# Altium PCB BSR049A.PcbDoc (part 1 of 3)
Units mil, origin at the board's own origin, x right, y up, seen from the top; angles counter-clockwise.
Board outline 3160 x 2500 mil, 4 copper layers (Top Layer1, Layer2, Layer3, Bottom Layer4), stack 61.2 mil thick; 91 components, 27 nets, 205 pads, 285 vias.
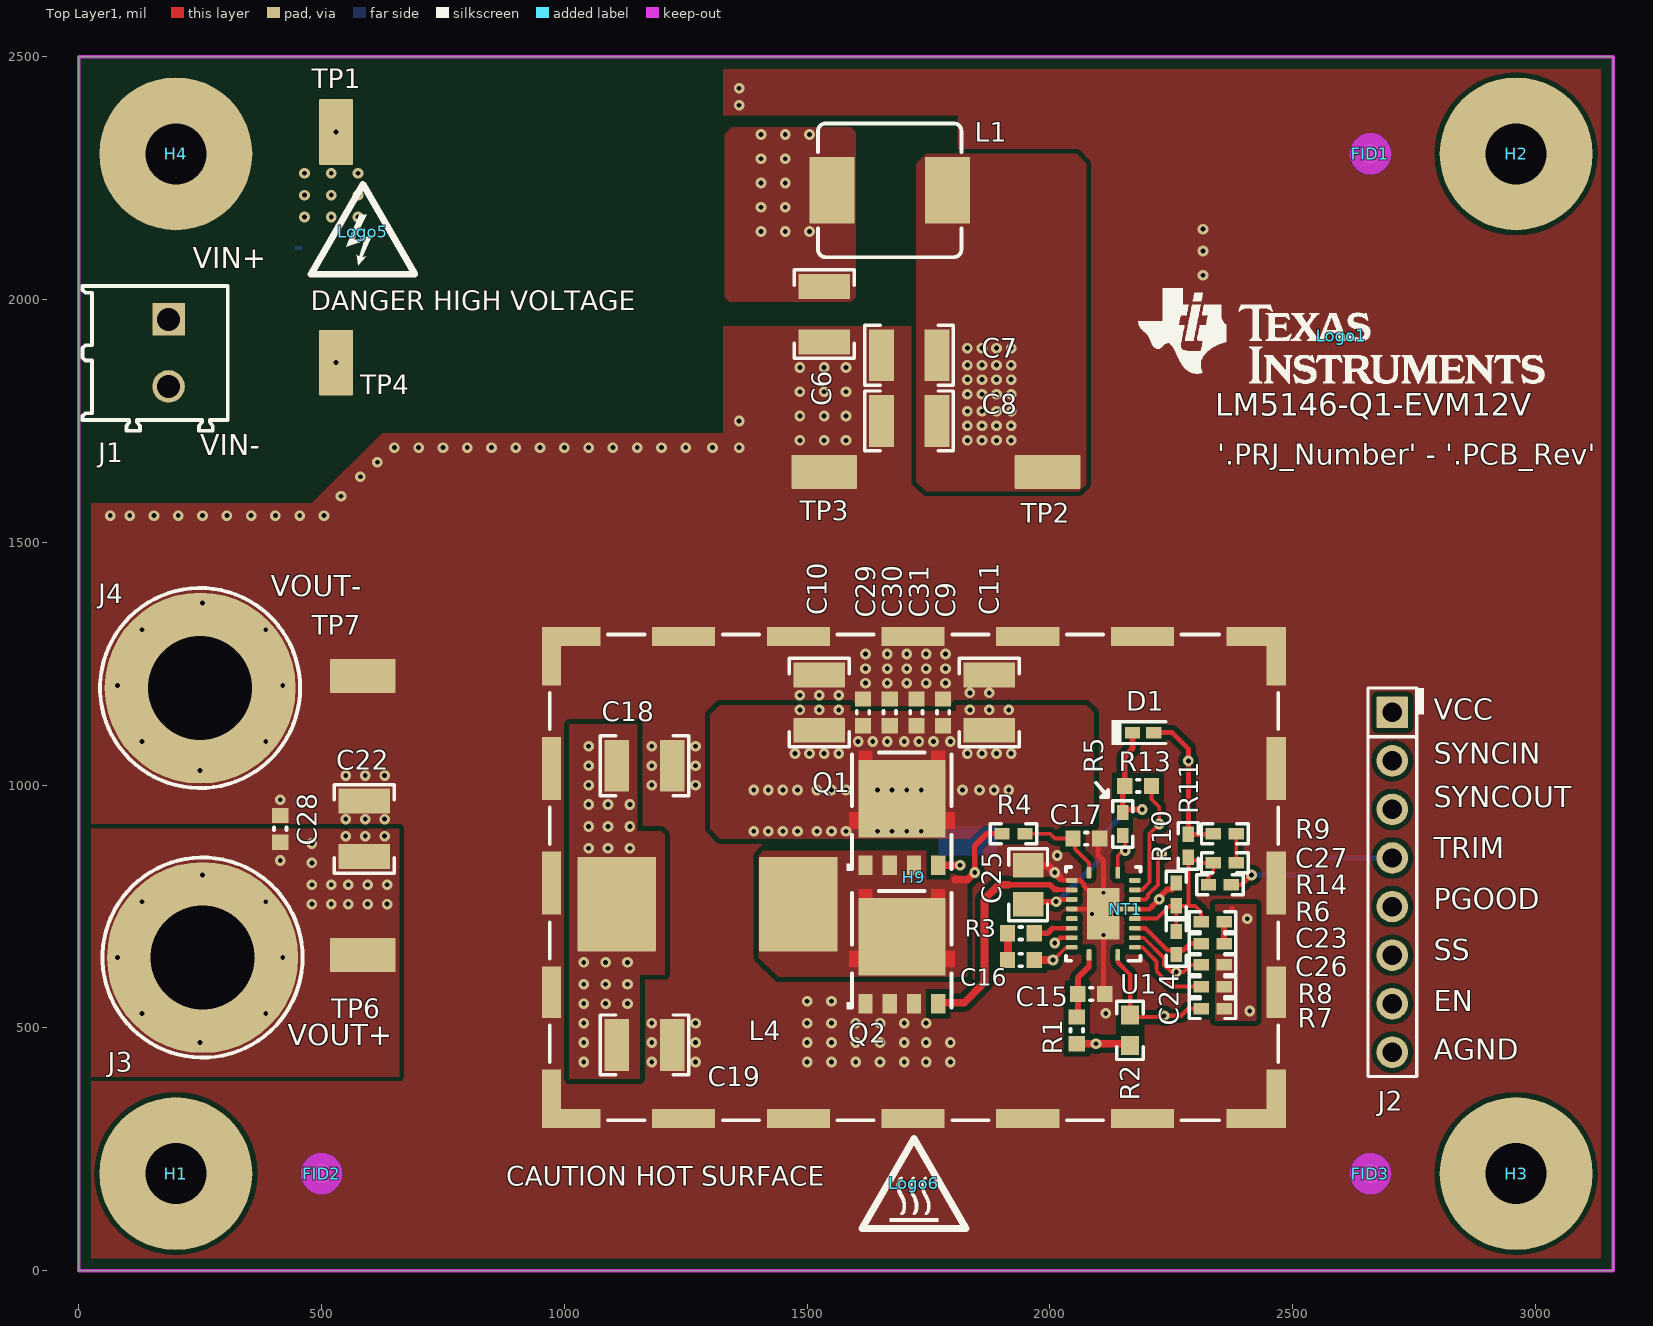
[diagram p0: Top Layer1 view]
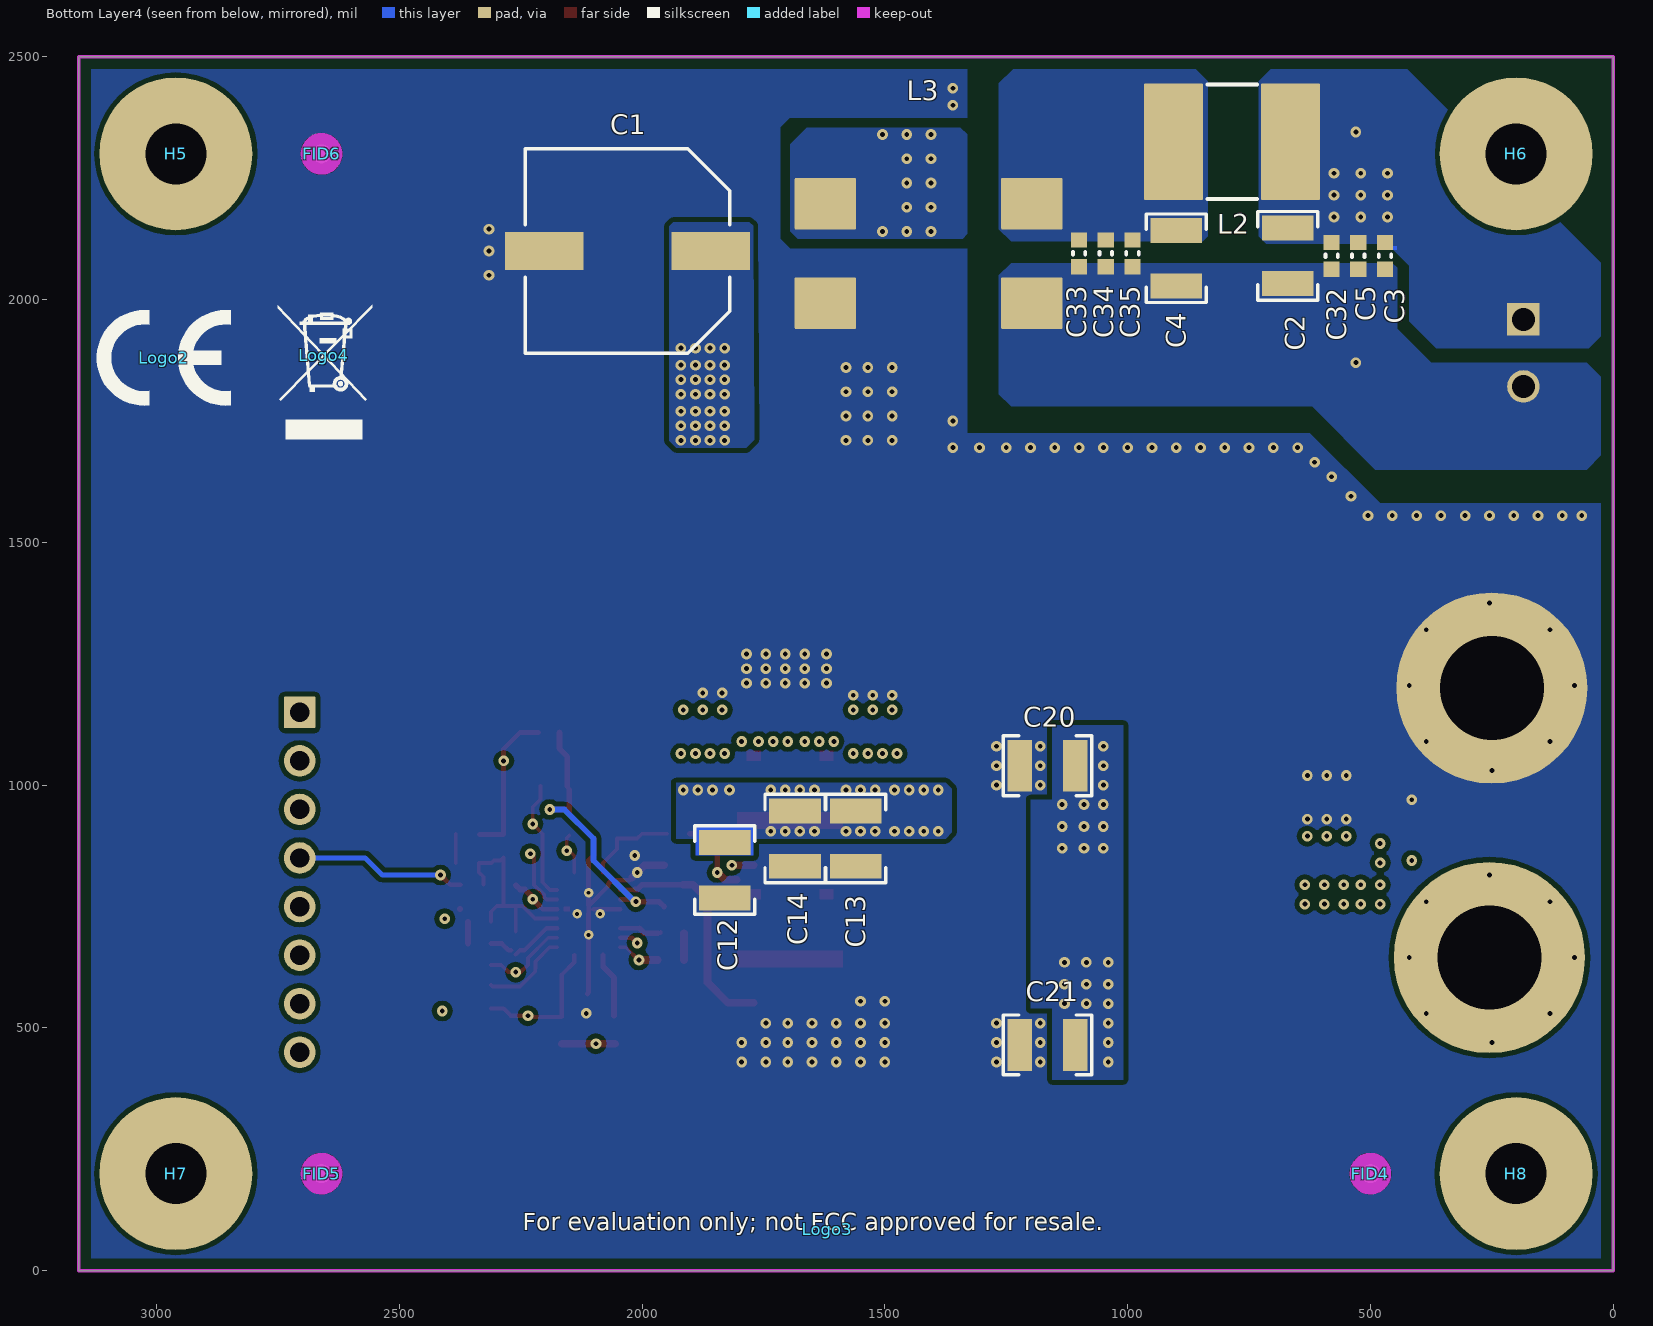
[diagram p1: Bottom Layer4 view, seen from below]
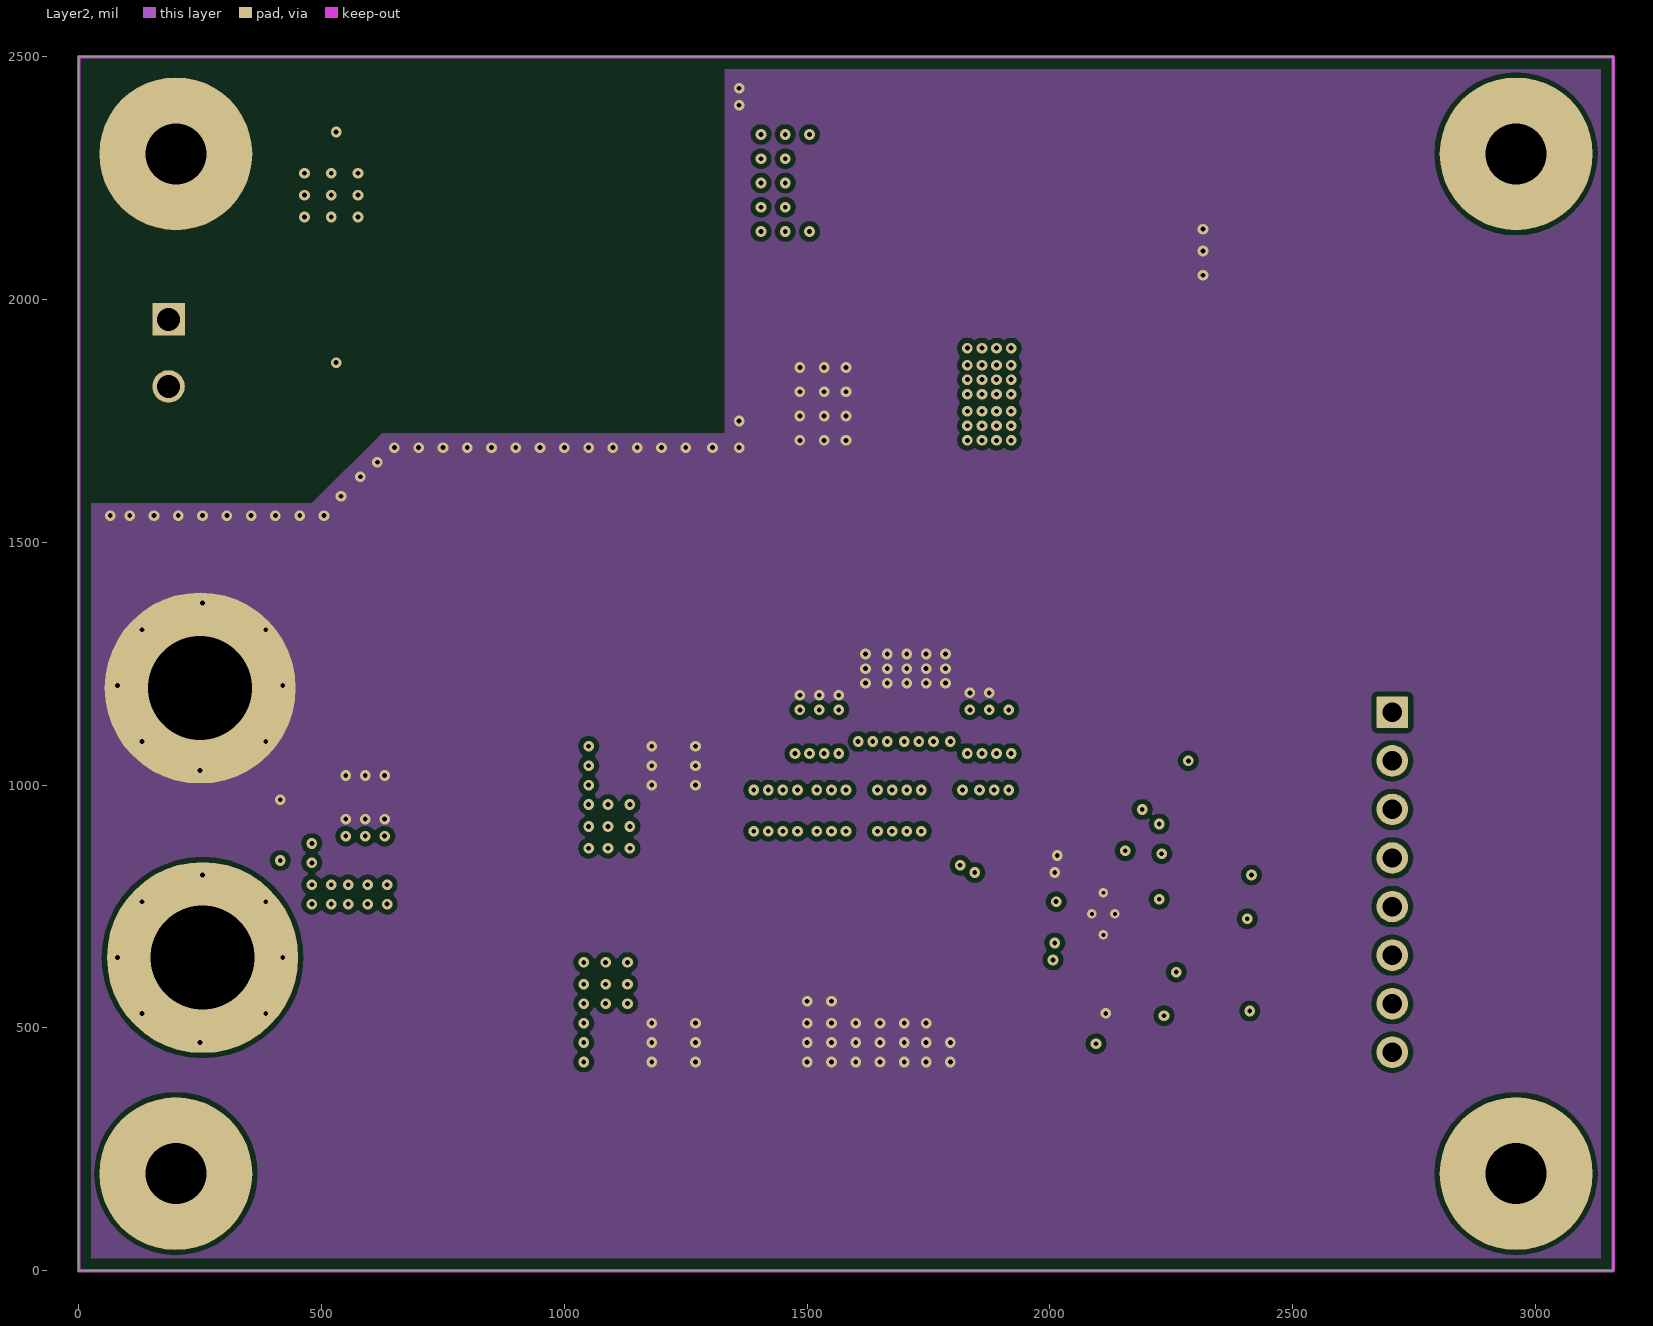
[diagram p2: Layer2]
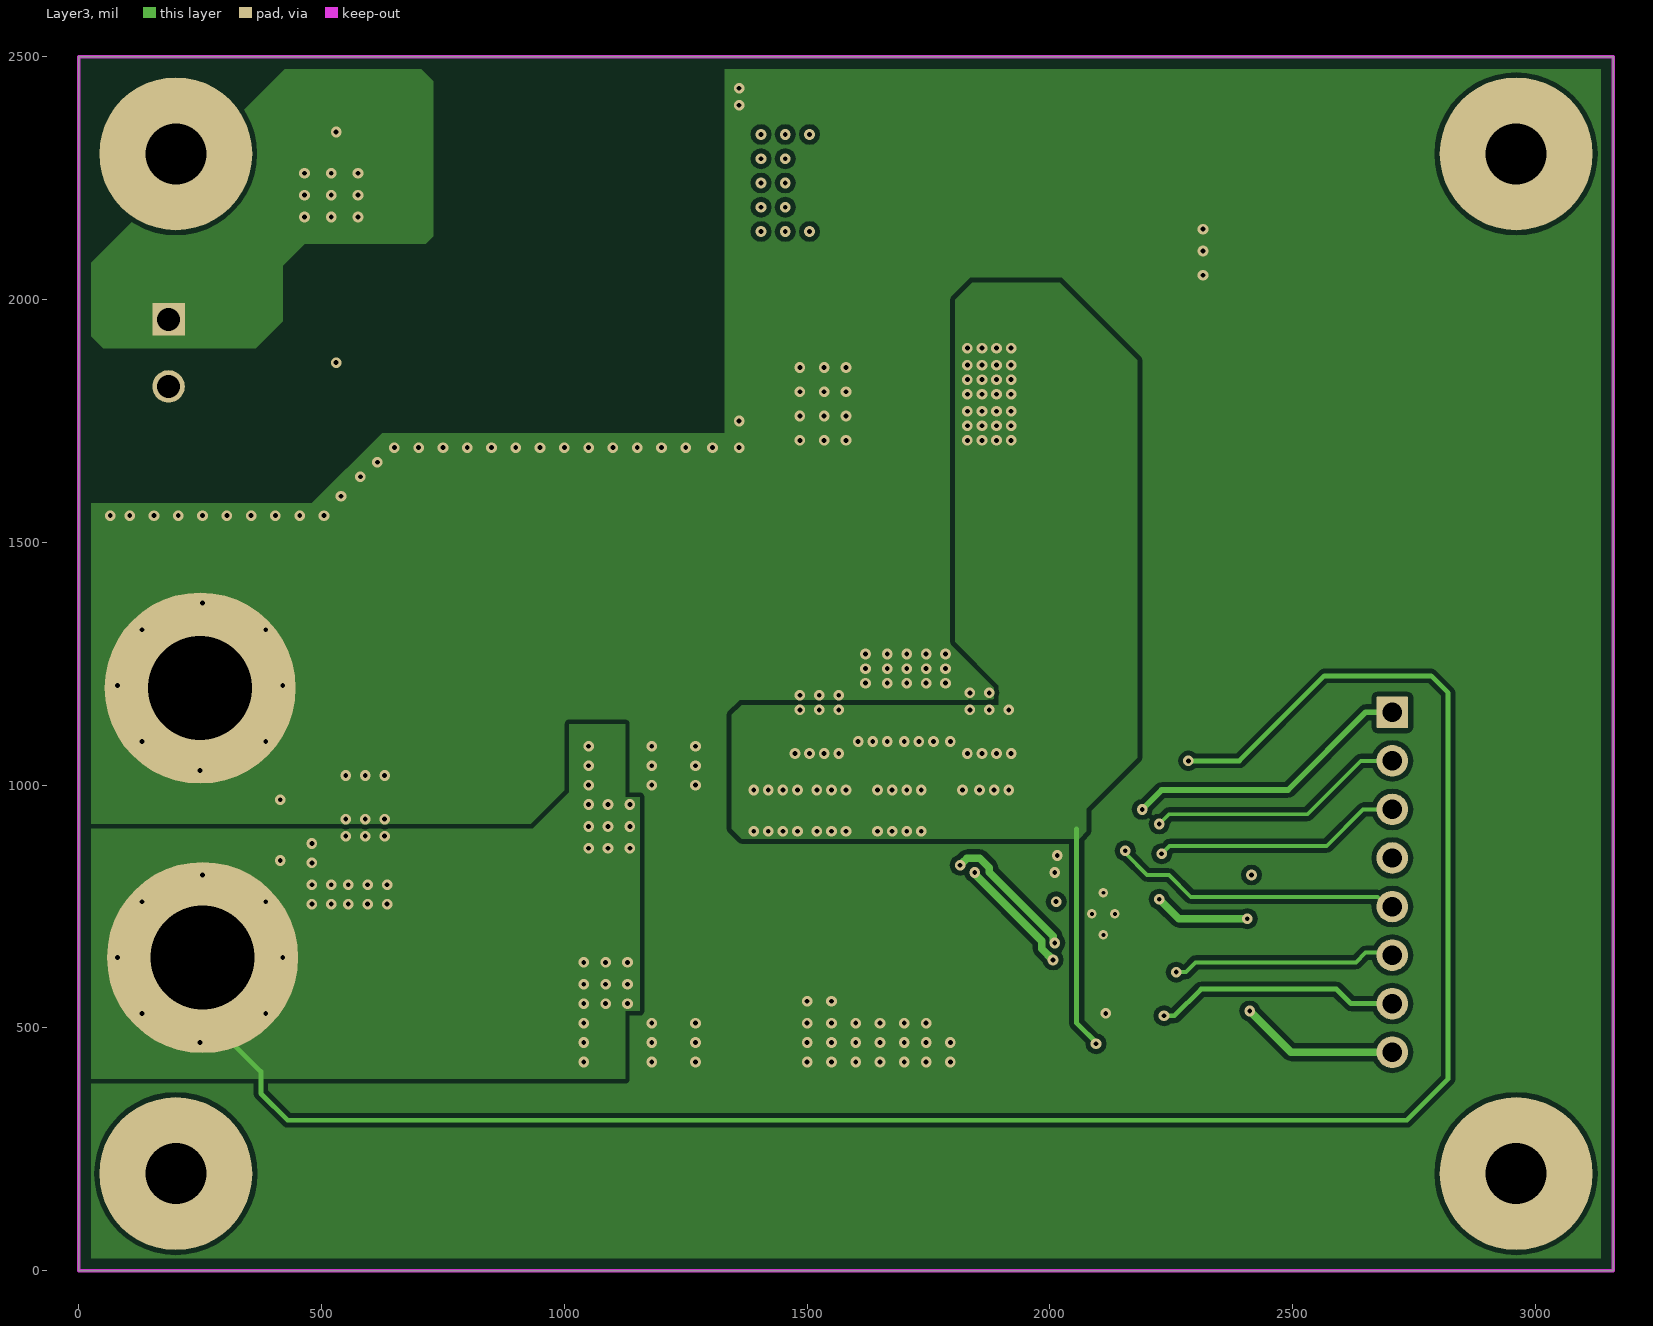
[diagram p3: Layer3]

## Layer stack, top to bottom
Top Solder: solder mask 0.4, Solder Resist, Dk 3.5
Top Layer1: signal copper 2.8
Dielectric1: core 6, FR-4, Dk 4.2
Layer2: signal copper 2.8
Dielectric 3: prepreg 38, FR4, Dk 4.2
Layer3: signal copper 2.8
Dielectric 2: core 6, FR4, Dk 4.2
Bottom Layer4: signal copper 2.8
Bottom Solder: solder mask 0.4, Solder Resist, Dk 3.5

## Board outline
0,0 3160,0 3160,2500 0,2500

## Design rules (kind name [scope] priority, off if disabled: settings)
AcuteAngle [All] p1: minimum=4.50000000000000E+0001 checktracksonly=FALSE
AssemblyTestPointUsage [All] p1: valid=2
BoardOutlineClearance BoardOutlineClearance_MountingHoles [OnCopper and InComponentClass('Mounting Holes')] p1: gap=40 ignorepadtopadclearanceinfootprint=FALSE
BoardOutlineClearance BoardOutlineClearance_Poly [OnCopper and IsPoly] p2: gap=25 ignorepadtopadclearanceinfootprint=FALSE
BoardOutlineClearance [OnCopper and Not InComponentClass('Logo') and not InComponentClass('FiducialMark') and not InRegion(1000,500,4000,800) and not InPoly] p3: gap=50 ignorepadtopadclearanceinfootprint=FALSE
Clearance Clearance_Fiducial [(InComponent('FID1') OR InComponent('FID2') OR InComponent('FID3')OR InComponent('FID4')OR InComponent('FID5')OR InComponent('FID6'))] p1: gap=0 ignorepadtopadclearanceinfootprint=FALSE
Clearance Clearance_Keepouts [((IsTrack Or IsArc) And Not InPoly) And IsFree and IsKeepOut vs ((IsTrack Or IsArc) And Not InPoly) And IsFree and IsKeepOut] p2: gap=0 ignorepadtopadclearanceinfootprint=FALSE
Clearance Clearance_Poly [InPolygon] p3: gap=10 ignorepadtopadclearanceinfootprint=FALSE
Clearance [All] p4: gap=7.87 ignorepadtopadclearanceinfootprint=FALSE except(0: Arc-Hole Track-Hole SMDPad-Hole THPad-Hole Via-Hole Fill-Hole Poly-Hole Region-Hole Text-Hole; 6: SMDPad-Via THPad-Via)
ComponentClearance ComponentClearance_HotLogo [InComponent('Logo6')] p1: gap=0 collisioncheckmode=3 verticalgap=0 showdistances=FALSE
ComponentClearance ComponentClearance-NetTie [HasFootprint('Net-Tie_10mil') vs HasFootprint('RGY0020B')] p2: gap=0 collisioncheckmode=3 verticalgap=0 showdistances=FALSE
ComponentClearance ComponentClearance_MountingHoles_FiducialMarks [InComponentClass('Mounting Holes') vs InComponentClass('FiducialMark')] p3: gap=50 collisioncheckmode=3 verticalgap=10 showdistances=FALSE
ComponentClearance ComponentClearance_Shunt [InComponentClass('Header') vs InComponentClass('Shunt')] p4: gap=0 collisioncheckmode=3 verticalgap=0 showdistances=FALSE
ComponentClearance ComponentClearance_Logo [InComponentClass('Logo')] p5: gap=50 collisioncheckmode=3 verticalgap=10 showdistances=FALSE
ComponentClearance ComponentClearance_ScrewToNut [(HasFootprint('NY PMS 440 0025 PH')) vs (HasFootprint('Keystone_1902C'))] p6: gap=5 collisioncheckmode=3 verticalgap=10 showdistances=FALSE
ComponentClearance ComponentClearance_MountingHoles [InComponentClass('Mounting Holes')] p7: gap=140 collisioncheckmode=3 verticalgap=100000 showdistances=FALSE
ComponentClearance ComponentClearance_SmallPassives [HasFootprint('0201*') or HasFootprint('0402*') or HasFootprint('0508') or HasFootprint('0603*') or HasFootprint('0612') or HasFootprint('0805*') or HasFootprint('0815*') or HasFootprint('0830*') or HasFootprint('1206*') or HasFootprint('1210*') or HasFootprint('1808*') or HasFootprint('1812*') or HasFootprint('1825*') or HasFootprint('2010*') or HasFootprint('2220*') or HasFootprint('2225*') or HasFootprint('2512*') or HasFootprint('2728*') or HasFootprint('3518*') vs HasFootprint('0201*') or HasFootprint('0402*') or HasFootprint('0508') or HasFootprint('0603*') or HasFootprint('0612') or HasFootprint('0805*') or HasFootprint('0815*') or HasFootprint('0830*') or HasFootprint('1206*') or HasFootprint('1210*') or HasFootprint('1808*') or HasFootprint('1812*') or HasFootprint('1825*') or HasFootprint('2010*') or HasFootprint('2220*') or HasFootprint('2225*') or HasFootprint('2512*') or HasFootprint('2728*') or HasFootprint('3518*')] p8: gap=14.96 collisioncheckmode=3 verticalgap=10 showdistances=FALSE
ComponentClearance ComponentClearance_THtoSMT [IsThruComponent vs IsSMTComponent] p9: gap=40 collisioncheckmode=3 verticalgap=30 showdistances=FALSE
ComponentClearance ComponentClearance_THtoTH [IsThruComponent vs IsThruComponent] p10: gap=30 collisioncheckmode=3 verticalgap=30 showdistances=FALSE
ComponentClearance [All] p11: gap=20 collisioncheckmode=3 verticalgap=10 showdistances=FALSE
DiffPairsRouting [All] p1: maxlimit=100 minlimit=10 mostfreqgap=10 toplayer_minwidth=15 toplayer_maxwidth=15 toplayer_prefwidth=15 midlayer1_minwidth=15 midlayer1_maxwidth=15 midlayer1_prefwidth=15 midlayer2_minwidth=15 midlayer2_maxwidth=15 midlayer2_prefwidth=15 bottomlayer_minwidth=15 bottomlayer_maxwidth=15 bottomlayer_prefwidth=15 maxuncoupledlength=1000
FabricationTestPointUsage TestPointUsage [All] p1: valid=2 allowmultiple=FALSE
FabricationTestpoint Testpoint [All] p1: side=3 testpointundercomponent=TRUE minsize=40 maxsize=100 preferedsize=60 minholesize=0 maxholesize=40 preferedholesize=32 testpointgrid=1 allowsidetop=TRUE allowsidebottom=TRUE usegrid=TRUE gridtolerance=0.01
FanoutControl Fanout_LCC [IsLCC] p1: bgadir=Out bgaviamode=Centered fanoutstyle=Auto fanoutdirection=Alternating viagrid=1 // Fanout_LCC (Default Rule)
FanoutControl Fanout_BGA [IsBGA] p2: bgadir=Out bgaviamode=Centered fanoutstyle=Auto fanoutdirection=Alternating viagrid=1 // Fanout_BGA (Default Rule)
FanoutControl Fanout_Default [All] p4: bgadir=Out bgaviamode=Centered fanoutstyle=Auto fanoutdirection=Alternating viagrid=1 // Fanout_Default (Default Rule)
FanoutControl Fanout_Small [(CompPinCount < 5)] p5: bgadir=Out bgaviamode=Centered fanoutstyle=Auto fanoutdirection=OutThenIn viagrid=1 // Fanout_Small (Default Rule)
HoleSize [All] p1: absolutevalues=TRUE maxlimit=251 minlimit=7.87 maxpercent=80.000 minpercent=20.000
MinimumAnnularRing MinimumAnnularRing_ThermalPadVias [IsVia and InAnyComponent] p1: minimumring=5.8
MinimumAnnularRing [All] p2: minimumring=6
MinimumSolderMaskSliver MinimumSolderMaskSliver_Logo [InComponentClass('Logo') vs InComponentClass('Logo')] p1: minsoldermaskwidth=0.7
MinimumSolderMaskSliver [All] p2: minsoldermaskwidth=3.94
PlaneConnect [All] p1: planeconnectstyle=Relief reliefexpansion=10 reliefentries=4 reliefconductorwidth=10 reliefairgap=10
PolygonConnect [All] p1: connectstyle=Direct reliefconductorwidth=10 reliefentries=4 polygonreliefangle="90 Angle" airgapwidth=10
RoutingVias ThermalPadVias [IsVia and InAnyComponent] p1: holewidth=7.87 width=19.68 viastyle="Through Hole" minholewidth=7.87 minwidth=19.68 maxholewidth=12.99 maxwidth=23.62
RoutingVias [All] p2: holewidth=10 width=22 viastyle="Through Hole" minholewidth=7.87 minwidth=20 maxholewidth=40 maxwidth=65
SilkToBoardRegionClearance [Not ((IsComment or IsDesignator) And (Hide <> 'False')) and not InRegion(1000,500,4000,800)] p1:
SilkToSilkClearance SilkToSilkClearance_Pb-FreeLogo [(HasFootprint('Pb-Free_Overlay_Medium') OR HasFootprint('Pb-Free_Overlay_Small')) vs (HasFootprint('Pb-Free_Overlay_Medium') OR HasFootprint('Pb-Free_Overlay_Small'))] p1: silktosilkclearance=0
SilkToSilkClearance [All] p2: silktosilkclearance=4
SilkToSolderMaskClearance SilkToComponentPadClearance [(IsPad or IsFill or IsRegion) and InAnycomponent] p1: minsilkscreentomaskgap=5 clearancetoexposedcopper=TRUE
SilkToSolderMaskClearance "Silk to Solder Mask Opening" [All] p2: minsilkscreentomaskgap=4 clearancetoexposedcopper=FALSE
SolderMaskExpansion [All] p1: expansion=1.97
Width [All] p1: maxlimit=100 minlimit=6 preferedwidth=10 checkconnectedcopper=TRUE
15 further rules are at their usual default settings.

## Classes and differential pairs
component class "Mounting Holes": H1 H2 H3 H4
component class AssemblyNote: ZZ2 ZZ3 ZZ4
component class Header: J2
component class Logo: Logo1
component class FiducialMark: FID1 FID2 FID3 FID4 FID5 FID6
component class BSR049A_HW: !PCB1 FID1 FID2 FID3 FID4 FID5 FID6 H1 H2 H3 H4 H5 H6 H7 H8 H9 H? Logo1 Logo2 Logo3 Logo4 Logo5 Logo6 ZZ2 ZZ3 ZZ4
component class BSR049A: "As short as possble" C1 C2 C3 C4 C5 C6 C7 C8 C9 C10 C11 C12 C13 C14 C15 C16 C17 C18 C19 C20 C21 C22 C23 C24 C25 C26 C27 C28 C29 C30 C31 C32 C33 C34 C35 Cc2 "Close to Q1" "Close to Q1S" "Close to Q3" "Close to Q3S" "Close to Q5" "Close to Q6" Css Cvin D1 J1 J2 J3 J4 L1 L2 L3 L4 L6 NT1 Q1 Q2 Q? R1 R2 R3 R4 R5 R6 R7 R8 R9 R10 R11 R13 R14 R25 R26 Rvu1 TP1 TP2 TP3 TP4 TP6 TP7 TP8 TP9 TP14 U1

## Components (designator, comment, footprint, x,y, rotation, side; value= is the part's Value field where it differs from the comment)
C1 "EEE-FK2A330P" SM_RADIAL_G 2030,2100 r0 bottom value=33uF
C2 "CGA6N3X7R2A225K230AB" 1210_250 670,2090 r270 bottom value=2.2uF
C3 "CGA3E2X7R2A102K080AA" 0603L 470,2090 r270 bottom value=1000pF
C4 "CGA6N3X7R2A225K230AB" 1210_250 900,2085 r270 bottom value=2.2uF
C5 "GRM188R72A103KA01D" 0603L 525,2090 r270 bottom value=0.01uF
C6 "CGA6N3X7R2A225K230AB" 1210_250 1535,1970 r270 top value=2.2uF
C7 "CGA6N3X7R2A225K230AB" 1210_250 1710,1885 r180 top value=2.2uF
C8 "CGA6N3X7R2A225K230AB" 1210_250 1710,1750 r180 top value=2.2uF
C9 "GRM188R72A103KA01D" 0603L 1780,1150 r90 top value=0.01uF
C10 "C3225X7S2A475K200AE" 1210 1525,1170 r90 top value=4.7uF
C11 "C3225X7S2A475K200AE" 1210 1875,1170 r90 top value=4.7uF
C12 "C3225X7S2A475K200AE" 1210 1830,825 r270 bottom value=4.7uF
C13 "C3225X7S2A475K200AE" 1210 1560,890 r270 bottom value=4.7uF
C14 "C3225X7S2A475K200AE" 1210 1685,890 r270 bottom value=4.7uF
C15 "CGA3E3X7S2A104K080AB" 0603L 2085,570 r0 top value=0.1uF
C16 "CGA3E3X7S2A104K080AB" 0603L 1940,640 r0 top value=0.1uF
C17 "885012006073" 0603L 2075,890 r0 top value=10pF
C18 "TMK325B7226KMHT" 1210_270 1165,1040 r0 top value=22uF
C19 "TMK325B7226KMHT" 1210_270 1165,465 r0 top value=22uF
C20 "TMK325B7226KMHT" 1210_270 1165,1040 r0 bottom value=22uF
C21 "TMK325B7226KMHT" 1210_270 1165,465 r0 bottom value=22uF
C22 "TMK325B7226KMHT" 1210_270 588.03,910 r90 top value=22uF
C23 "GRM155R71C472KA01D" 0402 2335,673.62 r0 top value=4700pF
C24 "CGA2B2C0G1H101J050BA" 0402 2260,675 r90 top value=100pF
C25 "GRM21BR71E225KA73L" 0805_HV 1955,795 r90 top value=2.2uF
C26 "C1005X7R1C473K050BC" 0402 2335,630 r180 top value=0.047uF
C27 "CGA2B2X7R1H102K050BA" 0402 2360,840 r180 top value=1000pF
C28 "CGA3E3X7S2A104K080AB" 0603L 415,910 r90 top value=0.1uF
C29 "GRM188R72A103KA01D" 0603L 1615,1150 r90 top value=0.01uF
C30 "GRM188R72A103KA01D" 0603L 1670,1150 r90 top value=0.01uF
C31 "GRM188R72A103KA01D" 0603L 1725,1150 r90 top value=0.01uF
C32 "CGA3E3X7S2A104K080AB" 0603L 580,2090 r270 bottom value=0.1uF
C33 "CGA3E3X7S2A104K080AB" 0603L 1100,2095 r270 bottom value=0.1uF
C34 "GRM188R72A103KA01D" 0603L 1045,2095 r270 bottom value=0.01uF
C35 "CGA3E2X7R2A102K080AA" 0603L 990,2095 r270 bottom value=1000pF
D1 "BAT41KFILM" SOD-523 2191.81,1108.21 r0 top value=100V
FID1 "Fiducial" Fiducial10-20 2660,2300 r0 top
FID2 "Fiducial" Fiducial10-20 500,200 r0 top
FID3 "Fiducial" Fiducial10-20 2660,200 r0 top
FID4 "Fiducial" Fiducial10-20 500,200 r180 bottom
FID5 "Fiducial" Fiducial10-20 2660,200 r180 bottom
FID6 "Fiducial" Fiducial10-20 2660,2300 r180 bottom
H1 "NY PMS 440 0025 PH" "NY PMS 440 0025 PH" 200,200 r0 top
H2 "NY PMS 440 0025 PH" "NY PMS 440 0025 PH" 2960,2300 r0 top
H3 "NY PMS 440 0025 PH" "NY PMS 440 0025 PH" 2960,200 r0 top
H4 "NY PMS 440 0025 PH" "NY PMS 440 0025 PH" 200,2300 r0 top
H5 "1902C" Keystone_1902C 2960,2300 r180 bottom
H6 "1902C" Keystone_1902C 200.36,2300 r180 bottom
H7 "1902C" Keystone_1902C 2960,200 r180 bottom
H8 "1902C" Keystone_1902C 200.36,200 r180 bottom
H9 "BMI-S-205-F" Laird_BMI-S-205-F 1720,810 r270 top locked
J1 "Vin" Phoenix_1984617 185,1890 r270 top
J2 "TSW-108-07-G-S" TSW-108-07-G-S 2705,800 r270 top
J3 "Vout" Keystone575-8 255,645 r180 top
J4 "GND" Keystone575-8 250,1200 r90 top
L1 "VCMT063T-1R5MN5" VCMT063T 1670,2225 r0 top value=1.5uH
L2 "800 ohm" 2220_390 785,2325 r0 bottom
L3 "ACM12V-701-2PL-TL00" TDK_ACM12V 1410,2095 r180 bottom
L4 "VCHA105D-6R8MS6" VCHA105D 1295,755 r180 top value=6.8uH
Logo1 "Texas Instruments" TI_Stacked_Overlay_Small 2600,1925 r0 top
Logo2 "CE Mark" CE_Mark_5mm 2985,1880 r180 bottom
Logo3 "FCC disclaimer" FCC_disclaimer 1618.34,85 r180 bottom
Logo4 "WEEE logo" WEEE_Minimum 2655,1885 r180 bottom
Logo5 "DANGER HIGH VOLTAGE" IEC_HighVoltage_Small 585,2140 r0 top
Logo6 "CAUTION HOT SURFACE" IEC_HotSurface_Small 1720,180 r0 top
NT1 "net tie" Net-Tie_10mil 2155,744.84 r180 top net-tie
Q1 "NVMFS6B25NLT1G" SO-8FL 1695,945 r90 top value=100V
Q2 "NVMFS6B14NLT1G" SO-8FL 1695,660 r90 top value=100V
R1 "ERJ-3RQF2R2V" 0603L 2055,495 r90 top value=2.20
R2 "CRCW0603100KFKEA" 0603 2165,495 r90 top value=100k
R3 "ERJ-3RQF2R2V" 0603L 1940,695 r180 top value=2.20
R4 "CRCW0402619RFKED" 0402 1925,900 r180 top value=619
R5 "CRCW040220K0FKED" 0402 2150,920 r270 top value=20.0k
R6 "CRCW04028K06FKED" 0402 2335,718.62 r0 top value=8.06k
R7 "CRCW040210K5FKED" 0402 2335,540 r180 top value=10.5k
R8 "CRCW040224K9FKED" 0402 2335,585 r0 top value=24.9k
R9 "CRCW040251R1FKED" 0402 2360,900 r0 top value=51.1
R10 "CRCW04021K50FKED" 0402 2260,775 r270 top value=1.50k
R11 "CRCW040221K0FKED" 0402 2285,875 r270 top value=21.0k
R13 "CRCW060320K0FKEA" 0603L 2181.54,998.46 r0 top value=20.0k
R14 "CRCW040236K5FKED" 0402 2350,795 r180 top value=36.5k
TP1 "5017" Keystone_5017 530,2345 r90 top
TP2 "Vin" Keystone_5017 1995,1645 r180 top
TP3 "GND" Keystone_5017 1535,1645 r180 top
TP4 "GND" Keystone_5017 530,1870 r90 top
TP6 "GND" Keystone_5017 585,650 r0 top
TP7 "GND" Keystone_5017 585,1225 r0 top
U1 "LM5146QRGYRQ1" RGY0020B 2110,735 r180 top
ZZ2 "These assemblies are ESD sensitive, ESD precautions shall be observed." AssemblyNote 115,3275 r0 top
ZZ3 "These assemblies must be clean and free from flux and all contaminants. Use of no clean flux is not acceptable." AssemblyNote 120,3135 r0 top
ZZ4 "These assemblies must comply with workmanship standards IPC-A-610 Class 2, unless otherwise specified." AssemblyNote 115,2975 r0 top

## Footprints (in the part's own frame and the unit in brackets; to place one, negate y for a bottom-side part, rotate by r counter-clockwise, add the part's x,y. Pads: shape width x height; smd on the part's side, far side on the other; paste and mask are expansions set on the pad)
0402 [mm] "0402 from SM-752 data"
  rect 0.8x0.6 smd: 1(-0.6,0) 2(0.6,0)
  silkscreen extent -1.22,-0.52 1.22,0.52, body extent -0.55,-0.3 0.55,0.3, height 0.6
0603 [mm] "0603 from SM-752 data"
  rect 1x0.95 smd: 1(-0.8,0) 2(0.8,0)
  silkscreen extent -1.52,-0.69 1.52,0.69, body extent -0.87,-0.47 0.87,0.47, height 1
0603L [mm] "0603 from SM-752 data"
  rect 0.8x0.85 smd: 1(-0.7,0) 2(0.7,0)
  silkscreen extent -0.07,-0.33 0.07,0.33, body extent -0.87,-0.47 0.87,0.47, height 1
0805_HV [mil] "0805 with 30mil clearance between pads"
  rect 50x63 smd: 1(-40,0) 2(40,0)
  silkscreen extent -74,-40 74,40, body extent -43,-29 43,29, height 57
1210 [mm] "1210 from SM-752 data"
  rect 1.3x2.7 smd: 1(-1.45,0) 2(1.45,0)
  silkscreen extent -2.32,-1.57 2.32,1.57, body extent -1.7,-1.35 1.7,1.35, height 1.35
1210_250 [mm] "1210"
  rect 1.3x2.7 smd: 1(-1.45,0) 2(1.45,0)
  silkscreen extent -2.32,-1.57 2.32,1.57, body extent -1.7,-1.35 1.7,1.35, height 2.5
1210_270 [mm] "1210"
  rect 1.3x2.7 smd: 1(-1.45,0) 2(1.45,0)
  silkscreen extent -2.32,-1.57 2.32,1.57, body extent -1.7,-1.35 1.7,1.35, height 2.7
2220_390 [mm] "Laird recommended land pattern"
  rrect3% 3.07x6.1 smd: 1(-3.06,0) 2(3.06,0)
  silkscreen extent -1.3,-3 1.3,3, body extent -2.8,-2.54 2.79,2.54, height 3.9
AssemblyNote [mil] "Assembly Note"
CE_Mark_5mm [mil] "Minimum text height for CE Mark"
  silkscreen extent -138,-98 138,98
FCC_disclaimer [mil]
Fiducial10-20 [mm]
  round 1 smd mask+0.5: 1(0,0)
  Top Layer1 keep-out circle w1.178: c0,0 r0.5
IEC_HighVoltage_Small [mil]
  silkscreen extent -107,-88 107,97
IEC_HotSurface_Small [mil]
  silkscreen extent -107,-93 107,92
Keystone575-8 [mm] "Banana Jack"
  round 10 hole 5.45: 1(0,0)
  silkscreen extent -5.23,-5.23 5.23,5.23, body extent -3.92,-3.94 3.95,3.94, height 2.36
Keystone_1902C [mil] "Hex Standoff, 4-40 threaded, nylon"
  round 1 on Mech4: 0(0,0)
  body extent -145,-126 146,126, height 501
Keystone_5017 [mm] "PC Test Point, SMT"
  rrect6% 3.43x1.78 smd: 1(0,0)
  body extent -1.35,-0.51 1.35,0.51, height 1.51
Laird_BMI-S-205-F [mm] "Standard Surface Mount Shield, 38.1 x 25.4 mm, Height 6 mm"
  rect 1x3.3 smd: 1(-12.6,11.95) 1(-12.6,5.95) 1(-12.6,-0.05) 1(-12.6,-6.05) 1(-12.6,-12.05) 1(12.6,11.95) 1(12.6,5.95) 1(12.6,-0.05) 1(12.6,-6.05) 1(12.6,-12.05)
  rect 1x3.05 smd: 1(-12.6,17.875) 1(-12.6,-17.925) 1(12.6,17.875) 1(12.6,-17.925)
  round 0.5 smd: 1(-12.6,-18.95) 1(-12.6,18.85) 1(12.6,-18.95) 1(12.6,18.85)
  rect 3.05x1 smd: 1(-11.575,-18.95) 1(-11.575,18.95) 1(11.575,-18.95) 1(11.575,18.95)
  rect 3.3x1 smd: 1(-5.7,-18.95) 1(-5.7,18.95) 1(0.3,-18.95) 1(0.3,18.95)
  rect 2.7x1 smd: 1(6,-18.95) 1(6,18.95)
  silkscreen extent -12.7,-19.05 12.7,19.05, body extent -13,-19.35 13.01,19.36, height 6
Net-Tie_10mil [mil] "10mil net tie, no solder mask opening, no solder paste"
  rect 10x10 smd paste-5 mask-5: 1(-10,0) 2(10,0)
  Top Layer1 region: -6,5 6,5 6,-5 -6,-5
"NY PMS 440 0025 PH" [mm] "4-40 nylon screw and mounting hole"
  round 8 hole 3.2: 1(0,0)
  body extent -3.3,-3.3 3.3,3.3, height 2.69
Phoenix_1984617 [mm] "Terminal Block, 3.5mm, 2x1, TH"
  rect 1.7x1.7 hole 1.2: 1(-1.75,0)
  round 1.7 hole 1.2: 2(1.75,0)
  silkscreen extent -3.5,-4.5 4.07,3.1, body extent -3.5,-4.5 4.07,3.1, height 9
RGY0020B [mm] "QFN, 20-Leads, Body 4.5x3.5mm, Pitch 0.5mm, Thermal Pad 2.7x1.7mm"
  rrect40% 0.25x0.6 smd: 1(-0.75,2.15) 10(-0.75,-2.15) 11(0.75,-2.15) 20(0.75,2.15)
  rrect40% 0.6x0.25 smd: 2(-1.65,1.75) 3(-1.65,1.25) 4(-1.65,0.75) 5(-1.65,0.25) 6(-1.65,-0.25) 7(-1.65,-0.75) 8(-1.65,-1.25) 9(-1.65,-1.75) 12(1.65,-1.75) 13(1.65,-1.25) 14(1.65,-0.75) 15(1.65,-0.25) 16(1.65,0.25) 17(1.65,0.75) 18(1.65,1.25) 19(1.65,1.75)
  rrect13% 0.75x1.21 on Top Paste: 21(-0.475,0.705) 21(-0.475,-0.705) 21(0.475,0.705) 21(0.475,-0.705)
  rrect6% 1.7x2.7 smd paste-1.4: 21(0,0)
  silkscreen extent -1.95,-2.45 1.95,2.45, body extent -1.75,-2.25 1.75,2.25, height 0.9
SM_RADIAL_G [mm] "10 x 10.2mm:  Panasonic G"
  rect 4.1x2 smd: 1(-4.35,0) 2(4.35,0)
  silkscreen extent -5.35,-5.35 5.35,5.35, body extent -5.25,-5.25 5.25,5.25, height 10.5
SO-8FL [mm] "ON SEMICONDUCTOR, DFN5 5x6, 1.27P, CASE 488AA"
  rect 1x0.75 smd: 1(-2.795,1.905) 2(-2.795,0.635) 3(-2.795,-0.635) 4(-2.795,-1.905)
  rect 4.055x4.56 smd: 5(0.698,0)
  Top Layer1 region: 3.2,-2.28 3.2,-1.53 2.65,-1.53 2.65,-2.28
  Top Layer1 region: 3.2,1.53 3.2,2.28 2.655,2.28 2.655,1.53
  Top Layer1 region: 0,-2.775 0,2.775 -0.905,2.775 -0.905,-2.775
  silkscreen extent -3.1,-2.6 3.1,2.9, body extent -3.17,-2.67 3.17,2.67, height 1.11
SOD-523 [mm] "NXP Semiconductor recommended land pattern, nominal STEP model"
  rect 0.8x0.6 smd paste-0.05: 1(-0.55,0) 2(0.55,0)
  silkscreen extent -1.65,-0.66 1.2,0.66, body extent -0.8,-0.4 0.8,0.4, height 0.72
TDK_ACM12V [mm] "SMD, 4-Leads, Body 12x11mm, Pitch 5.2mm"
  rrect4% 3.2x2.7 smd: 1(-5.4,2.6) 2(-5.4,-2.6) 3(5.4,-2.6) 4(5.4,2.6)
  body extent -6,-5.5 6,5.5, height 5.55
TI_Stacked_Overlay_Small [mil]
  silkscreen extent -418,-98 418,98
TSW-108-07-G-S [mm] "Samtec 100mil, 1x8, 230 mil above insulator"
  rrect6% 1.65x1.65 hole 1.016: 1(-8.89,0)
  round 1.65 hole 1.016: 2(-6.35,0) 3(-3.81,0) 4(-1.27,0) 5(1.27,0) 6(3.81,0) 7(6.35,0) 8(8.89,0)
  silkscreen extent -10.16,-1.27 10.16,1.65, body extent -10.16,-1.27 10.16,1.27, height 8.38
VCHA105D [mm] "SMD, 2-Leads, Body 10.85x10mm"
  rrect2% 4.1x4.95 smd: 1(-4.75,0) 2(4.75,0)
  body extent -5.6,-5.15 5.6,5.15, height 5.4
VCMT063T [mm] "CYNTEC"
  rect 2.35x3.5 smd: 1(-3.025,0) 2(3.025,0)
  silkscreen extent -3.75,-3.5 3.75,3.5, body extent -3.65,-3.4 3.65,3.4, height 3
WEEE_Minimum [mil] "WEEElie bin"
  silkscreen extent -95,-172 99,104

## Part data
C1: library part CMP-0011203-2, "CAP, AL, 33 uF, 100 V, +/- 20%, 0.7 ohm, AEC-Q200 Grade 2, SMD", Cap_Case=G, Manufacturer=Panasonic, Supplier Part Number 1=PCE3846CT-ND, Tolerance_%=20%, Value1="0.7 ohm", Value2=100V, ValueDisplayed=33uF, AEC Category=Q200, AEC Grade=2, AEC Qualified=Y, Cap_F=33µF, ComponentLink1Description="Datasheet link", ComponentLink1URL=https://industrial.panasonic.com/cdbs/www-data/pdf/RDE0000/ABA0000C1181.pdf, CompType=Capacitor, ESR_ohm=7d, IRMS_A=2dA, LatestRevisionDate=2017-03-09, MountType=SMT, PackageReference="SMT Radial G", PartNumber=EEE-FK2A330P, Polarized=Y, Publisher="Texas Instruments", RoHS=Y, Series=FK, SizeArea_mm2=123.6, SizeAreaWB_mm2=172.2, SizeX_mm=12, SizeY_mm=10.3, SizeZ_mm=10.2, Supplier 1=Digi-Key, Supplier 2=Mouser, Supplier 3=Farnell, Supplier Part Number 2=667-EEE-FK2A330P, Supplier Part Number 3=1850130, TaMax_C=105°C, TaMin_C=-55°C, Technology=AL, U/M=EA, VDC_V=100V
C2 C4 C6 C7 C8: library part CMP-0009152-2, "CAP, CERM, 2.2 uF, 100 V, +/- 10%, X7R, AEC-Q200 Grade 1,", Cap_Case=1210_250, Manufacturer=TDK, Supplier Part Number 1=445-5866-1-ND, TempCo=X7R, Tolerance_%=10%, Value1="0.00173 ohm", Value2=100V, ValueDisplayed=2.2uF, AEC Category=Q200, AEC Grade=1, AEC Qualified=Y, Cap_F=2.2µF, ComponentLink1Description="Datasheet link", ComponentLink1URL=https://product.tdk.com/en/search/capacitor/ceramic/mlcc/info?part_no=CGA6N3X7R2A225K230AB, CompType=Capacitor, ESR_ohm=1.73m, IRMS_A=5.59317A, LatestRevisionDate=2017-03-09, MountType=SMT, PartNumber=CGA6N3X7R2A225K230AB, Polarized=N, Published=2008-06-19, Publisher="Texas Instruments", RoHS=Y, SizeArea_mm2=8, SizeAreaWB_mm2=14.7, SizeX_mm=3.2, SizeY_mm=2.5, SizeZ_mm=2.5, Supplier 1=Digi-Key, Supplier 2=Mouser, Supplier Part Number 2=810-CGA6N3X7R2A225K230AB, TaMax_C=125°C, TaMin_C=-55°C, Technology=Ceramic, U/M=EA, VDC_V=100V
C3 C35: library part CMP-0007081-4, "CAP, CERM, 1000 pF, 100 V, +/- 10%, X7R, AEC-Q200 Grade 1, 0603", Cap_Case=0603, Manufacturer=TDK, Supplier Part Number 1=445-5806-1-ND, TempCo=X7R, Tolerance_%=10%, Value1="1.97137 ohm", Value2=100V, ValueDisplayed=1000pF, AEC Category=Q200, AEC Grade=1, AEC Qualified=Y, Cap_F=1nF, ComponentLink1Description="Datasheet link", ComponentLink1URL=https://product.tdk.com/en/search/capacitor/ceramic/mlcc/info?part_no=CGA3E2X7R2A102K080AA, CompType=Capacitor, ESR_ohm=1.97137, IRMS_A=3.05705dA, LatestRevisionDate=2017-03-09, MountType=SMT, PackageReference=0603, PartNumber=CGA3E2X7R2A102K080AA, Polarized=N, Published=2008-06-19, Publisher="Texas Instruments", RoHS=Y, SizeArea_mm2=1.28, SizeAreaWB_mm2=4.68, SizeX_mm=1.6, SizeY_mm=0.8, SizeZ_mm=1, Supplier 1=Digi-Key, Supplier 2=Mouser, Supplier Part Number 2=810-CGA3E2X7R2A102K080AA, TaMax_C=125°C, TaMin_C=-55°C, Technology=Ceramic, U/M=EA, VDC_V=100V
C5 C9 C29 C30 C31 C34: library part CMP-0007468-5, "CAP, CERM, 0.01 uF, 100 V, +/- 10%, X7R, 0603", Cap_Case=0603, Manufacturer=MuRata, Supplier Part Number 1=GRM188R72A103KA01D-ND, TempCo=X7R, Tolerance_%=10%, Value1=Unknown, Value2=100V, ValueDisplayed=0.01uF, AEC Category=Q200, AEC Qualified=?, Cap_F=10nF, ComponentLink1Description="Datasheet link", ComponentLink1URL=http://search.murata.co.jp/Ceramy/PnsearchViewAction.do?HnOFG=ON&HnNFG=ON&SEL_CNT=50&sLang=en&sKey=GRM188R72A103KA01D&x=9&y=9&search=startwith, CompType=Capacitor, LatestRevisionDate=2017-03-09, MountType=SMT, PackageReference=0603, PartNumber=GRM188R72A103KA01D, Polarized=N, Published=2008-06-19, Publisher="Texas Instruments", RoHS=Y, SizeArea_mm2=1.28, SizeAreaWB_mm2=4.68, SizeX_mm=1.6, SizeY_mm=0.8, SizeZ_mm=1, Supplier 1=Digi-Key, Supplier 2=Mouser, Supplier Part Number 2=81-GRM188R72A103KA1D, TaMax_C=125°C, TaMin_C=-55°C, Technology=Ceramic, U/M=EA, VDC_V=100V
C10 C11 C12 C13 C14: library part CMP-0009135-2, "CAP, CERM, 4.7 uF, 100 V, +/- 10%, X7S, 1210", Cap_Case=1210, Manufacturer=TDK, Supplier Part Number 1=445-8912-1-ND, TempCo=X7S, Tolerance_%=10%, Value1=Unknown, Value2=100V, ValueDisplayed=4.7uF, AEC Category=Q200, AEC Grade=N/A, AEC Qualified=N, Cap_F=4.7µF, ComponentLink1Description="Datasheet link", ComponentLink1URL=https://product.tdk.com/info/en/catalog/datasheets/mlcc_commercial_midvoltage_en.pdf, CompType=Capacitor, LatestRevisionDate=2017-03-09, MountType=SMT, PackageReference=1210, PartNumber=C3225X7S2A475K200AE, Polarized=N, Published=2008-06-19, Publisher="Texas Instruments", RoHS=Y, SizeArea_mm2=8, SizeAreaWB_mm2=14.7, SizeX_mm=3.2, SizeY_mm=2.5, SizeZ_mm=1.35, Supplier 1=Digi-Key, Supplier 2=Newark, Supplier 3=Mouser, Supplier Part Number 2=93T4954, Supplier Part Number 3=810-C3225X7S2A475KST, TaMax_C=125°C, TaMin_C=-55°C, Technology=Ceramic, U/M=EA, VDC_V=100V
C15 C16 C28 C32 C33: library part CMP-0007099-4, "CAP, CERM, 0.1 uF, 100 V, +/- 10%, X7S, AEC-Q200 Grade 1, 0603", Cap_Case=0603, Manufacturer=TDK, Supplier Part Number 1=445-6938-1-ND, TempCo=X7S, Tolerance_%=10%, Value1="0.04959 ohm", Value2=100V, ValueDisplayed=0.1uF, AEC Category=Q200, AEC Grade=1, AEC Qualified=Y, Cap_F=100nF, ComponentLink1Description="Datasheet link", ComponentLink1URL=https://product.tdk.com/en/search/capacitor/ceramic/mlcc/info?part_no=CGA3E3X7S2A104K080AB, CompType=Capacitor, ESR_ohm=0.04959, IRMS_A=7.51618dA, LatestRevisionDate=2017-03-09, MountType=SMT, PackageReference=0603, PartNumber=CGA3E3X7S2A104K080AB, Polarized=N, Published=2008-06-19, Publisher="Texas Instruments", RoHS=Y, SizeArea_mm2=1.28, SizeAreaWB_mm2=4.68, SizeX_mm=1.6, SizeY_mm=0.8, SizeZ_mm=1, Supplier 1=Digi-Key, Supplier 2=Newark, Supplier 3=Mouser, Supplier Part Number 2=04X3163, Supplier Part Number 3=810-CGA3E3X7S2A104K, TaMax_C=125°C, TaMin_C=-55°C, Technology=Ceramic, U/M=EA, VDC_V=100V
C17: library part CMP-0078152-1, "CAP, CERM, 10 pF, 100 V,+/- 5%, C0G/NP0, 0603", Cap_Case=0603, Manufacturer="Wurth Elektronik", TempCo=C0G/NP0, Tolerance_%=5%, Value2=100V, ValueDisplayed=10pF, AEC Category=Q200, AEC Grade=N/A, AEC Qualified=N, Cap_F=10pF, ComponentLink1Description="Datasheet link", ComponentLink1URL=http://katalog.we-online.com/pbs/datasheet/885012006073.pdf, CompType=Capacitor, LatestRevisionDate=2017-10-09, MountType=SMT, PackageReference=0603, PartNumber=885012006073, Polarized=N, Published=2008-06-19, Publisher="Texas Instruments", RoHS=Y, SizeArea_mm2=1.28, SizeAreaWB_mm2=4.68, SizeX_mm=1.6, SizeY_mm=0.8, SizeZ_mm=1, TaMax_C=125°C, TaMin_C=-55°C, Technology=Ceramic, U/M=EA, VDC_V=100V
C18 C19 C20 C21 C22: library part CMP-0009255-2, "CAP, CERM, 22 uF, 25 V, +/- 10%, X7R, AEC-Q200 Grade 1, 1210", Cap_Case=1210, Manufacturer="Taiyo Yuden", Supplier Part Number 1=587-4337-1-ND, TempCo=X7R, Tolerance_%=10%, Value1=Unknown, Value2=25V, ValueDisplayed=22uF, AEC Category=Q200, AEC Grade=1, AEC Qualified=Y, Cap_F=22µF, ComponentLink1Description="Datasheet link", ComponentLink1URL=http://www.yuden.co.jp/productdata/catalog/en/mlcc_all_hq_e.pdf, CompType=Capacitor, LatestRevisionDate=2017-03-09, MountType=SMT, PackageReference=1210, PartNumber=TMK325B7226KMHT, Polarized=N, Published=2008-06-19, Publisher="Texas Instruments", RoHS=Y, SizeArea_mm2=8, SizeAreaWB_mm2=14.7, SizeX_mm=3.2, SizeY_mm=2.5, SizeZ_mm=2.7, Supplier 1=Digi-Key, Supplier 2=Mouser, Supplier Part Number 2=963-TMK325B7226KMHT, TaMax_C=125°C, TaMin_C=-55°C, Technology=Ceramic, U/M=EA, VDC_V=25V
C23: library part CMP-0006652-2, "CAP, CERM, 4700 pF, 16 V, +/- 10%, X7R, 0402", Cap_Case=0402, Manufacturer=MuRata, Supplier Part Number 1=GRM155R71C472KA01D-ND, TempCo=X7R, Tolerance_%=10%, Value1=Unknown, Value2=16V, ValueDisplayed=4700pF, AEC Category=Q200, AEC Qualified=?, Cap_F=4.7nF, ComponentLink1Description="Datasheet link", ComponentLink1URL=http://search.murata.co.jp/Ceramy/PnsearchViewAction.do?HnOFG=ON&HnNFG=ON&SEL_CNT=50&sLang=en&sKey=GRM155R71C472KA01D&x=9&y=9&search=startwith, CompType=Capacitor, LatestRevisionDate=2017-03-09, MountType=SMT, PackageReference=0402, PartNumber=GRM155R71C472KA01D, Polarized=N, Published=2008-06-19, Publisher="Texas Instruments", RoHS=Y, SizeArea_mm2=0.5, SizeAreaWB_mm2=3, SizeX_mm=1, SizeY_mm=0.5, SizeZ_mm=0.6, Supplier 1=Digi-Key, Supplier 2=Mouser, Supplier Part Number 2=81-GRM155R71C472KA1D, TaMax_C=125°C, TaMin_C=-55°C, Technology=Ceramic, U/M=EA, VDC_V=16V
C24: library part CMP-0006308-2, "CAP, CERM, 100 pF, 50 V, +/- 5%, C0G/NP0, AEC-Q200 Grade 1, 0402", Cap_Case=0402, Manufacturer=TDK, Supplier Part Number 1=445-5596-1-ND, TempCo=C0G/NP0, Tolerance_%=5%, Value1=Unknown, Value2=50V, ValueDisplayed=100pF, AEC Category=Q200, AEC Grade=1, AEC Qualified=Y, Cap_F=100pF, ComponentLink1Description="Datasheet link", ComponentLink1URL=http://product.tdk.com/en/catalog/datasheets/mlcc_automotive_general_en.pdf, CompType=Capacitor, LatestRevisionDate=2017-03-09, MountType=SMT, PackageReference=0402, PartNumber=CGA2B2C0G1H101J050BA, Polarized=N, Published=2008-06-19, Publisher="Texas Instruments", RoHS=Y, SizeArea_mm2=0.5, SizeAreaWB_mm2=3, SizeX_mm=1, SizeY_mm=0.5, SizeZ_mm=0.6, Supplier 1=Digi-Key, Supplier 2=Newark, Supplier 3=Mouser, Supplier Part Number 2=52W9564, Supplier Part Number 3=810-CGA2B2C0G1H101J, TaMax_C=125°C, TaMin_C=-55°C, Technology=Ceramic, U/M=EA, VDC_V=50V
C25: library part CMP-0008342-2, "CAP, CERM, 2.2 uF, 25 V, +/- 10%, X7R, 0805", Cap_Case=0805, Manufacturer=MuRata, Supplier Part Number 1=490-3331-1-ND, TempCo=X7R, Tolerance_%=10%, Value1="0.005 ohm", Value2=25V, ValueDisplayed=2.2uF, AEC Category=Q200, AEC Qualified=?, Cap_F=2.2µF, ComponentLink1Description="Datasheet link", ComponentLink1URL=http://search.murata.co.jp/Ceramy/PnsearchViewAction.do?HnOFG=ON&HnNFG=ON&SEL_CNT=50&sLang=en&sKey=GRM21BR71E225KA73L&x=9&y=9&search=startwith, CompType=Capacitor, ESR_ohm=5m, LatestRevisionDate=2017-03-09, MountType=SMT, PackageReference=0805, PartNumber=GRM21BR71E225KA73L, Polarized=N, Published=2008-06-19, Publisher="Texas Instruments", RoHS=Y, SizeArea_mm2=2.5, SizeAreaWB_mm2=6.75, SizeX_mm=2, SizeY_mm=1.25, SizeZ_mm=1.45, Supplier 1=Digi-Key, Supplier 2=Mouser, Supplier 3=Farnell, Supplier Part Number 2=81-GRM21BR71E225KA73, Supplier Part Number 3=1735542, TaMax_C=125°C, TaMin_C=-55°C, Technology=Ceramic, U/M=EA, VDC_V=25V
C26: library part CMP-0006294-2, "CAP, CERM, 0.047 uF, 16 V, +/- 10%, X7R, 0402", Cap_Case=0402, Manufacturer=TDK, Supplier Part Number 1=445-1264-1-ND, TempCo=X7R, Tolerance_%=10%, Value1="0.0305 ohm", Value2=16V, ValueDisplayed=0.047uF, AEC Category=Q200, AEC Grade=N/A, AEC Qualified=N, Cap_F=47nF, ComponentLink1Description="Datasheet link", ComponentLink1URL=http://www.tdk.co.jp/tefe02/e412_c.pdf, CompType=Capacitor, ESR_ohm=0.0305, LatestRevisionDate=2017-03-09, MountType=SMT, PackageReference=0402, PartNumber=C1005X7R1C473K050BC, Polarized=N, Published=2008-06-19, Publisher="Texas Instruments", RoHS=Y, SizeArea_mm2=0.5, SizeAreaWB_mm2=3, SizeX_mm=1, SizeY_mm=0.5, SizeZ_mm=0.6, Supplier 1=Digi-Key, Supplier 2=Newark, Supplier 3=Mouser, Supplier Part Number 2=90R7602, Supplier Part Number 3=810-C1005X7R1C473K, TaMax_C=125°C, TaMin_C=-55°C, Technology=Ceramic, U/M=EA, VDC_V=16V
C27: library part CMP-0006314-2, "CAP, CERM, 1000 pF, 50 V, +/- 10%, X7R, AEC-Q200 Grade 1, 0402", Cap_Case=0402, Manufacturer=TDK, Supplier Part Number 1=445-5605-1-ND, TempCo=X7R, Tolerance_%=10%, Value1="2.25564 ohm", Value2=50V, ValueDisplayed=1000pF, AEC Category=Q200, AEC Grade=1, AEC Qualified=Y, Cap_F=1nF, ComponentLink1Description="Datasheet link", ComponentLink1URL=https://product.tdk.com/en/search/capacitor/ceramic/mlcc/info?part_no=CGA2B2X7R1H102K050BA, CompType=Capacitor, ESR_ohm=2.25564, IRMS_A=2.80466dA, LatestRevisionDate=2017-03-09, MountType=SMT, PackageReference=0402, PartNumber=CGA2B2X7R1H102K050BA, Polarized=N, Published=2008-06-19, Publisher="Texas Instruments", RoHS=Y, SizeArea_mm2=0.5, SizeAreaWB_mm2=3, SizeX_mm=1, SizeY_mm=0.5, SizeZ_mm=0.6, Supplier 1=Digi-Key, Supplier 2=Mouser, Supplier Part Number 2=810-CGA2B2X7R1H102K050BA, TaMax_C=125°C, TaMin_C=-55°C, Technology=Ceramic, U/M=EA, VDC_V=50V
D1: library part CMP-0028894-2, "Diode, Schottky, 100 V, 0.2 A, SOD-523", Manufacturer=STMicroelectronics, Supplier Part Number 1=497-5556-1-ND, Value1=0.2A, Value2=1V, AEC Category=Q101, AEC Qualified=N, ComponentLink1Description="Datasheet link", ComponentLink1URL=http://www.st.com/content/ccc/resource/technical/document/datasheet/5b/cd/d8/0a/45/56/41/6c/CD00130227.pdf/files/CD00130227.pdf/jcr:content/translations/en.CD00130227.pdf, CompType=Diode, Green_EU RoHS=Incomplete, Green_EU RoHS-2=Incomplete, Green_Lifecycle="Not Set", Green_REACh=Incomplete, Io_A=2dA, LatestRevisionDate=2017-05-08, MountType=SMT, PackageReference=SOD-523, PartNumber=BAT41KFILM, Published=2008-06-26, Publisher="Texas Instruments", RoHS=Y, SizeArea_mm2=1.53, SizeAreaWB_mm2=5.13, SizeX_mm=1.7, SizeY_mm=0.9, SizeZ_mm=0.65, Supplier 1=Digi-Key, Supplier 2=Newark, Supplier 3=Mouser, Supplier Part Number 2=05X9518, Supplier Part Number 3=511-BAT41KFILM, TJmax_C=150°C, Type=Schottky, U/M=EA, Vf_V=1V, Vr_V=100V
FID1 FID2 FID3 FID4 FID5 FID6: library part CMP-0077181-1, "Fiducial mark.  There is nothing to buy or mount.", Manufacturer=N/A, ClassName=FiducialMark, CompType=Fiducial, MountType=N/A, PackageReference=N/A, PartNumber=N/A
H1 H2 H3 H4: library part CMP-0003617-1, "Machine Screw, Round, #4-40 x 1/4, Nylon, Philips panhead", Manufacturer="B&F Fastener Supply", Supplier Part Number 1=H542-ND, ClassName="Mounting Holes", ComponentLink1Description="Datasheet Link", ComponentLink1URL=http://www.fasnetdirect.com/refguide/Nylpanms.pdf, CompType=Hardware, Key="NY PMS 440 0025 PH", LatestRevisionDate=2017-03-09, MountType=N/A, PackageReference=Screw, PartNumber="NY PMS 440 0025 PH", Publisher="Texas Instruments", RoHS=Y, Supplier 1=Digi-Key
H5 H6 H7 H8: library part CMP-0003610-1, "Standoff, Hex, 0.5\"L #4-40 Nylon", Manufacturer=Keystone, Supplier Part Number 1=36-1902C-ND, ComponentLink1Description="Datasheet Link", ComponentLink1URL=http://www.keyelco.com/pdfs/M55-prod31.pdf, CompType=Hardware, Key=1902C, LatestRevisionDate=2017-03-09, MountType=N/A, PackageReference=Standoff, PartNumber=1902C, Publisher="Texas Instruments", RoHS=Y, Supplier 1=Digi-Key
H9: library part CMP-0003954-1, "Standard Surface Mount Shield, 38.1 x 25.4 mm, Height 6 mm", Manufacturer="Laird-Signal Integrity Products", Supplier Part Number 1=903-1054-1-ND, ComponentLink1Description="Datasheet Link", ComponentLink1URL=http://cdn.lairdtech.com/home/brandworld/files/Board%20Level%20Shields%20Catalog%20Download.pdf, CompType=Hardware, Key=BMI-S-205-F, LatestRevisionDate=2017-03-09, MountType=SMT, PackageReference="Standard Surface Mount Shield, 38.1 x 25.4 mm, Height 6 mm", PartNumber=BMI-S-205-F, Publisher="Texas Instruments", RoHS=Y, Supplier 1=Digi-Key, Supplier 2=Newark, Supplier 3=Mouser, Supplier Part Number 2=72Y5231, Supplier Part Number 3=739-BMIS-205-F
J1: library part CMP-0055519-1, "Terminal Block, 3.5mm, 2x1, TH", Color=Green, Current_A=17.5A, Manufacturer="Phoenix Contact", PartNumber=1984617, Supplier Part Number 1=277-1721-ND, Voltage_V=200V, Cert_CULUS=Y, Cert_UL=Y, CNHeader=FALSE, ComponentLink1Description="Datasheet URL", ComponentLink1URL=https://www.phoenixcontact.com/online/portal/us?uri=pxc-oc-itemdetail:pid=1984617&library=usen&pcck=P-11-01-05&tab=1, CompType="Terminal Block", CT=TRUE, Gender=Female, LatestRevisionDate=26/05/2017, MountType=TH, Orientation=Vertical, PackageReference="Terminal Block, 3.5mm, 2x1, TH", PinCount=2, Pitch_mm=3.5, Publisher="Texas Instruments", RoHS=Y, Row_Count=1, Supplier 1=Digi-Key, Supplier 2=Newark, Supplier 3=Mouser, Supplier Part Number 2=15X5023, Supplier Part Number 3=651-1984617
J2: library part CMP-0075419-1, "Header, 100mil, 8x1, Gold, TH", Color=Black, Current_A=6.3A, Manufacturer=Samtec, Supplier Part Number 1=SAM1029-08-ND, Voltage_V=550V, Cert_CSA=Y, Cert_CULUS=N, Cert_UL=Y, Cert_VDE=N, ClassName=Header, CNHeader=True, ComponentLink1Description="Datasheet URL", ComponentLink1URL=http://samtec.com/ftppub/pdf/TSW_TH.PDF, CompType=Header, ContactFinish=Gold, CT=False, Gender=Male, Green_EU RoHS=Passed, Green_EU RoHS-2=Passed, Green_Lifecycle=Active, Green_REACh=Passed, LatestRevisionDate=2017-07-12, MountType=TH, Orientation=Vertical, PackageReference="8x1 Header", PartNumber=TSW-108-07-G-S, PinCount=8, Pitch_mm=2.54, Publisher="Texas Instruments", RoHS=Y, Row_Count=1, Shrouded=N, Supplier 1=Digi-Key
J3 J4: library part CMP-0055166-2, "Standard Banana Jack, Uninsulated, 8.9mm", Manufacturer=Keystone, PartNumber=575-8, Supplier Part Number 1=36-575-8-ND, CNHeader=FALSE, ComponentLink1Description="Datasheet URL", ComponentLink1URL=http://www.keyelco.com/pdfs/M55p95.pdf, CompType="Banana Jack", CT=TRUE, Green_EU RoHS=Passed, Green_EU RoHS-2=Incomplete, Green_Lifecycle=Active, Green_REACh=Passed, LatestRevisionDate=26/05/2017, MountType=TH, PackageReference=Keystone575-8, Publisher="Texas Instruments", RoHS=Y, Supplier 1=Digi-Key
L1: library part CMP-0059934-1, "Inductor, Drum Core, Powdered Iron, 1.5 uH, 9 A, 0.0125 ohm, AEC-Q200 Grade 0, SMD", Manufacturer=Cyntec, Value1="0.0125 ohm", Value2=9A, ValueDisplayed=1.5uH, AEC Category=Q200, AEC Grade=0, AEC Qualified=Y, ComponentLink1Description="Datasheet link", ComponentLink1URL=http://www.cyntec.com/upfile/products/download/VCMT063T.pdf, CompType=Inductor, DCR_ohm=0.0125, Imax_A=9A, Ind_H=1.5µH, Irms="10.5A @ 40C rise", Isat="9A @ 20% inductance drop", LatestRevisionDate=2017-06-02, Material="Powdered Iron", MountType=SMT, PackageReference=6.95x6.6x3.0mm, PartNumber=VCMT063T-1R5MN5, Published=2008-06-26, Publisher="Texas Instruments", RoHS=Y, SizeArea_mm2=45.87, SizeAreaWB_mm2=76.97, SizeX_mm=6.95, SizeY_mm=6.6, SizeZ_mm=3, Technology="Drum Core"
L2: library part CMP-0003396-1, "Ferrite Bead, 800 ohm @ 100 MHz, 8 A, 2220", Manufacturer="Laird-Signal Integrity Products", PartNumber=HR2220V801R-10, Supplier Part Number 1=240-2433-1-ND, Value1="0.01 ohm", Value2=8A, ComponentLink1Description="Datasheet link", ComponentLink1URL=https://assets.lairdtech.com/home/brandworld/files/HR2220V801R-10.pdf, CompType="Ferrite Bead", DCR_ohm=0.01, Imax_A=8A, LatestRevisionDate=2017-03-09, MountType=SMT, PackageReference=2220, Published=2014-04-30, Publisher="Texas Instruments", RoHS=Y, SizeArea_mm2=28.56, SizeAreaWB_mm2=53.96, SizeX_mm=5.6, SizeY_mm=5.1, SizeZ_mm=3.9, Supplier 1=Digi-Key, Supplier 2=Mouser, Supplier 3=Farnell, Supplier Part Number 2=875-HR2220V801R-10, Supplier Part Number 3=1697264, ValueDisplayed="800 ohm", Ztyp@1GHz_Ohm=75, ZTyp@100MHz_Ohm=800
L3: library part CMP-0084691-1, "Coupled inductor,  ohm, AEC-Q200 Grade 1, SMD", Manufacturer=TDK, AEC Category=Q200, AEC Grade=1, AEC Qualified=Y, ComponentLink1Description="Datasheet URL", ComponentLink1URL=https://product.tdk.com/info/en/catalog/datasheets/cmf_automotive_power_acm12v_en.pdf, CompType="Coupled Inductor", MountType=SMT, PackageReference=12x11mm, PartNumber=ACM12V-701-2PL-TL00, RoHS=Y, SizeArea_mm2=132, SizeAreaWB_mm2=182, SizeX_mm=12, SizeY_mm=11, SizeZ_mm=6
L4: library part CMP-0082255-1, "Inductor, Drum Core, Powdered Iron, 6.8 µH, 10.8 A, 0.014 ohm, AEC-Q200 Grade 0, SMD", Manufacturer=Cyntec, Value1="0.014 ohm", Value2=10.8A, ValueDisplayed=6.8µH, AEC Category=Q200, AEC Grade=0, AEC Qualified=Y, ComponentLink1Description="Datasheet link", ComponentLink1URL="https://sps16.itg.ti.com/sites/KMS/crossdivteams/altium/docs/ComponentDatasheets/CYNVC-175-018 (A3) VCHA105D MS6 Series_standard.pdf", CompType=Inductor, DCR_ohm=0.014, Imax_A=10.8A, Ind_H=6.8µH, Irms="10.8A @ 40C rise", Isat="11.4A @ 30% inductance drop", Material="Powdered Iron", MountType=SMT, PackageReference=10.85x10mm, PartNumber=VCHA105D-6R8MS6, RoHS=Y, SizeArea_mm2=108.5, SizeAreaWB_mm2=154.2, SizeX_mm=10.85, SizeY_mm=10, SizeZ_mm=5.4, Technology="Drum Core"
Logo1: library part CMP-0074838-1, "Texas Instrument Corporate Signature", ClassName=Logo, LatestRevisionDate=2017-07-06, Lib Reference=TI_Logo, PartNumber="Texas Instruments", Published=2009-03-03, Publisher="Texas Instruments", SymbolCreator=a0412235, SymbolVersion=2011-08-22
Logo2: library part CMP-0074844-1, LatestRevisionDate=2017-07-06, Lib Reference="CE Mark", PartNumber="CE Mark", Published=2009-03-03, Publisher="Texas Instruments", SymbolCreator=a0412235
Logo3: library part CMP-0074847-1, "FCC_disclaimer", LatestRevisionDate=2017-07-06, Lib Reference=FCC_disclaimer, PartNumber="FCC disclaimer", Published=2009-03-03, Publisher="Texas Instruments"
Logo4: library part CMP-0074769-1, Lib Reference="WEEE logo", PartNumber="WEEE logo"
Logo5: library part CMP-0074835-1, "IEC 61010-1 High Voltage Warning", LatestRevisionDate=2017-07-06, Lib Reference=IEC_HighVoltage, PartNumber="DANGER HIGH VOLTAGE", Published=2009-03-03, Publisher="Texas Instruments", SymbolCreator=a0412235, SymbolVersion=2011-08-22
Logo6: library part CMP-0074837-1, "IEC 61010-1 Hot Surface Warning", LatestRevisionDate=2017-07-06, Lib Reference=IEC_HotSurface, PartNumber="CAUTION HOT SURFACE", Published=2009-03-03, Publisher="Texas Instruments", SymbolCreator=a0412235, SymbolVersion=2011-08-22
NT1: library part CMP-0078142-2, "Single point connection between nets.", Manufacturer=N/A, CompType=Net-Tie, MountType=SMT, PackageReference=N/A, PartNumber=N/A
Q1: library part CMP-0082014-2, "MOSFET, N-CH, 100 V, 8 A, AEC-Q101, SO-8FL", Alternate Manufacturer=None, Manufacturer="ON Semiconductor", Supplier Part Number 1=NVMFS6B25NLT1G-ND, Value1="0.039 ohm", Value2="6.4 nC", AEC Category=Q101, AEC Qualified=Y, ChMode=Enhancement, ChType=N, ComponentLink1Description="Datasheet link", ComponentLink1URL=http://www.onsemi.com/pub/Collateral/NVMFS6B25NL-D.PDF, CompType=MOSFET, IdsMax_A=8A, MountType=SMT, PackageReference=SO-8FL, PartNumber=NVMFS6B25NLT1G, QgTyp_nC=6.4, Rdson45_ohm=0.039, RoHS=Y, SizeArea_mm2=31.6725, SizeAreaWB_mm2=58.2725, SizeX_mm=6.15, SizeY_mm=5.15, SizeZ_mm=1.1, Supplier 1=Digi-Key, Supplier 2=Mouser, Supplier Part Number 2=863-NVMFS6B25NLT1G, VdsMax_V=100V, Vgs_V=16V
Q2: library part CMP-0081522-2, "MOSFET, N-CH, 100 V, 11 A, AEC-Q101, SO-8FL", Alternate Manufacturer=None, Manufacturer="ON Semiconductor", Supplier Part Number 1=NVMFS6B14NLT1GOSCT-ND, Value1="0.019 ohm", Value2="8 nC", AEC Category=Q101, AEC Qualified=Y, ChMode=Enhancement, ChType=N, ComponentLink1Description="Datasheet link", ComponentLink1URL=http://www.onsemi.com/pub/Collateral/NVMFS6B14NL-D.PDF, CompType=MOSFET, IdsMax_A=11A, MountType=SMT, PackageReference=SO-8FL, PartNumber=NVMFS6B14NLT1G, QgTyp_nC=8, Rdson45_ohm=0.019, RoHS=Y, SizeArea_mm2=31.6725, SizeAreaWB_mm2=58.2725, SizeX_mm=5.15, SizeY_mm=6.15, SizeZ_mm=1, Supplier 1=Digi-Key, Supplier 2=Newark, Supplier 3=Mouser, Supplier Part Number 2=95Y0313, Supplier Part Number 3=863-NVMFS6B14NLT1G, VdsMax_V=100V, Vgs_V=16V
R1 R3: library part CMP-0022711-2, "RES, 2.20, 1%, 0.1 W, 0603", Manufacturer=Panasonic, Power_W=100mW, Supplier Part Number 1=P2.2AJCT-ND, TempCo="200 ppm/C", Tolerance_%=1%, Value2=0.1W, Value_Code=2R20, ValueDisplayed=2.20, AEC Category=Q200, AEC Qualified=?, ComponentLink1Description="Datasheet link", ComponentLink1URL=http://industrial.panasonic.com/www-data/pdf/AOA0000/AOA0000CE3.pdf, CompType=Resistor, LatestRevisionDate=2017-03-09, MountType=SMT, PackageReference=0603, PartNumber=ERJ-3RQF2R2V, Published=2008-06-26, Publisher="Texas Instruments", Res_ohm=2.2, RoHS=Y, SizeArea_mm2=1.28, SizeX_mm=1.6, SizeY_mm=0.8, SizeZ_mm=1, Supplier 1=Digi-Key, Supplier 2=Newark, Supplier 3=Mouser, Supplier Part Number 2=15R1437, Supplier Part Number 3=667-ERJ-3RQF2R2V, Technology="Thick Film", U/M=EA, Value1=1%
R2: library part CMP-0021990-4, "RES, 100 k, 1%, 0.1 W, AEC-Q200 Grade 0, 0603", Manufacturer=Vishay-Dale, Power_W=100mW, Supplier Part Number 1=541-100KHCT-ND, TempCo="100 ppm/C", Tolerance_%=1%, Value2=0.1W, Value_Code=100k, AEC Category=Q200, AEC Grade=0, AEC Qualified=Y, ComponentLink1Description="Datasheet link", ComponentLink1URL=http://www.vishay.com/docs/20035/dcrcwe3.pdf, CompType=Resistor, EIA_Code=E96, MountType=SMT, PackageReference=0603, PartNumber=CRCW0603100KFKEA, Res_ohm=100k, RoHS=E, SizeArea_mm2=1.28, SizeX_mm=1.6, SizeY_mm=0.8, SizeZ_mm=1, Supplier 1=Digi-Key, Supplier 2=Newark, Supplier 3=Mouser, Supplier Part Number 2=42K3668, Supplier Part Number 3=71-CRCW0603-100K-E3, Technology="Thick Film", Value1=1%, ValueDisplayed=100k, VDC_V=75V
R4: library part CMP-0026489-2, "RES, 619, 1%, 0.063 W, AEC-Q200 Grade 0, 0402", Manufacturer=Vishay-Dale, Power_W=63mW, Supplier Part Number 1=541-619LCT-ND, TempCo="100 ppm/C", Tolerance_%=1%, Value2=0.063W, Value_Code=619R, ValueDisplayed=619, AEC Category=Q200, AEC Grade=0, AEC Qualified=Y, ComponentLink1Description="Datasheet link", ComponentLink1URL=http://www.vishay.com/docs/20035/dcrcwe3.pdf, CompType=Resistor, EIA_Code=E96, MountType=SMT, PackageReference=0402, PartNumber=CRCW0402619RFKED, Res_ohm=619, RoHS=E, SizeArea_mm2=0.5, SizeX_mm=1, SizeY_mm=0.5, SizeZ_mm=0.6, Supplier 1=Digi-Key, Supplier 2=Newark, Supplier 3=Mouser, Supplier Part Number 2=52K7201, Supplier Part Number 3=71-CRCW0402-619-E3, Technology="Thick Film", Value1=1%, VDC_V=50V
R5: library part CMP-0026162-2, "RES, 20.0 k, 1%, 0.063 W, AEC-Q200 Grade 0, 0402", Manufacturer=Vishay-Dale, Power_W=63mW, Supplier Part Number 1=541-20.0KLCT-ND, TempCo="100 ppm/C", Tolerance_%=1%, Value2=0.063W, Value_Code=20k0, ValueDisplayed=20.0k, AEC Category=Q200, AEC Grade=0, AEC Qualified=Y, ComponentLink1Description="Datasheet link", ComponentLink1URL=http://www.vishay.com/docs/20035/dcrcwe3.pdf, CompType=Resistor, EIA_Code=E96, MountType=SMT, PackageReference=0402, PartNumber=CRCW040220K0FKED, Res_ohm=20k, RoHS=E, SizeArea_mm2=0.5, SizeX_mm=1, SizeY_mm=0.5, SizeZ_mm=0.6, Supplier 1=Digi-Key, Supplier 2=Newark, Supplier 3=Mouser, Supplier Part Number 2=52K6817, Supplier Part Number 3=71-CRCW0402-20K-E3, Technology="Thick Film", Value1=1%, VDC_V=50V
R6: library part CMP-0026588-2, "RES, 8.06 k, 1%, 0.063 W, AEC-Q200 Grade 0, 0402", Manufacturer=Vishay-Dale, Power_W=63mW, Supplier Part Number 1=541-8.06KLCT-ND, TempCo="100 ppm/C", Tolerance_%=1%, Value2=0.063W, Value_Code=8k06, ValueDisplayed=8.06k, AEC Category=Q200, AEC Grade=0, AEC Qualified=Y, ComponentLink1Description="Datasheet link", ComponentLink1URL=http://www.vishay.com/docs/20035/dcrcwe3.pdf, CompType=Resistor, EIA_Code=E96, MountType=SMT, PackageReference=0402, PartNumber=CRCW04028K06FKED, Res_ohm=8.06k, RoHS=E, SizeArea_mm2=0.5, SizeX_mm=1, SizeY_mm=0.5, SizeZ_mm=0.6, Supplier 1=Digi-Key, Supplier 2=Newark, Supplier 3=Mouser, Supplier Part Number 2=52K7286, Supplier Part Number 3=71-CRCW0402-8.06K-E3, Technology="Thick Film", Value1=1%, VDC_V=50V
R7: library part CMP-0025960-3, "RES, 10.5 k, 1%, 0.063 W, AEC-Q200 Grade 0, 0402", Manufacturer=Vishay-Dale, Power_W=63mW, Supplier Part Number 1=541-10.5KLCT-ND, TempCo="100 ppm/C", Tolerance_%=1%, Value2=0.063W, Value_Code=10k5, ValueDisplayed=10.5k, AEC Category=Q200, AEC Grade=0, AEC Qualified=Y, ComponentLink1Description="Datasheet link", ComponentLink1URL=http://www.vishay.com/docs/20035/dcrcwe3.pdf, CompType=Resistor, EIA_Code=E96, MountType=SMT, PackageReference=0402, PartNumber=CRCW040210K5FKED, Res_ohm=10.5k, RoHS=E, SizeArea_mm2=0.5, SizeX_mm=1, SizeY_mm=0.5, SizeZ_mm=0.6, Supplier 1=Digi-Key, Supplier 2=Newark, Supplier 3=Mouser, Supplier Part Number 2=52K6597, Supplier Part Number 3=71-CRCW0402-10.5K-E3, Technology="Thick Film", Value1=1%, VDC_V=50V
R8: library part CMP-0026196-2, "RES, 24.9 k, 1%, 0.063 W, AEC-Q200 Grade 0, 0402", Manufacturer=Vishay-Dale, Power_W=63mW, Supplier Part Number 1=541-24.9KLCT-ND, TempCo="100 ppm/C", Tolerance_%=1%, Value2=0.063W, Value_Code=24k9, ValueDisplayed=24.9k, AEC Category=Q200, AEC Grade=0, AEC Qualified=Y, ComponentLink1Description="Datasheet link", ComponentLink1URL=http://www.vishay.com/docs/20035/dcrcwe3.pdf, CompType=Resistor, EIA_Code=E96, MountType=SMT, PackageReference=0402, PartNumber=CRCW040224K9FKED, Res_ohm=24.9k, RoHS=E, SizeArea_mm2=0.5, SizeX_mm=1, SizeY_mm=0.5, SizeZ_mm=0.6, Supplier 1=Digi-Key, Supplier 2=Newark, Supplier 3=Mouser, Supplier Part Number 2=52K6876, Supplier Part Number 3=71-CRCW0402-24.9K-E3, Technology="Thick Film", Value1=1%, VDC_V=50V
R9: library part CMP-0026438-2, "RES, 51.1, 1%, 0.063 W, AEC-Q200 Grade 0, 0402", Manufacturer=Vishay-Dale, Power_W=63mW, Supplier Part Number 1=541-51.1LCT-ND, TempCo="100 ppm/C", Tolerance_%=1%, Value2=0.063W, Value_Code=51R1, ValueDisplayed=51.1, AEC Category=Q200, AEC Grade=0, AEC Qualified=Y, ComponentLink1Description="Datasheet link", ComponentLink1URL=http://www.vishay.com/docs/20035/dcrcwe3.pdf, CompType=Resistor, EIA_Code=E96, MountType=SMT, PackageReference=0402, PartNumber=CRCW040251R1FKED, Res_ohm=51.1, RoHS=E, SizeArea_mm2=0.5, SizeX_mm=1, SizeY_mm=0.5, SizeZ_mm=0.6, Supplier 1=Digi-Key, Supplier 2=Newark, Supplier 3=Mouser, Supplier Part Number 2=52K7132, Supplier Part Number 3=71-CRCW0402-51.1-E3, Technology="Thick Film", Value1=1%, VDC_V=50V